# Altium PCB VX.PcbDoc
Units mm, origin at the board's own origin, x right, y up, seen from the top; angles counter-clockwise.
Board outline 65 x 35 mm, 2 copper layers (Top Layer, Bottom Layer); 22 components, 14 nets, 81 pads, 6 vias.
Unrouted connection lines stored in the file: 20.
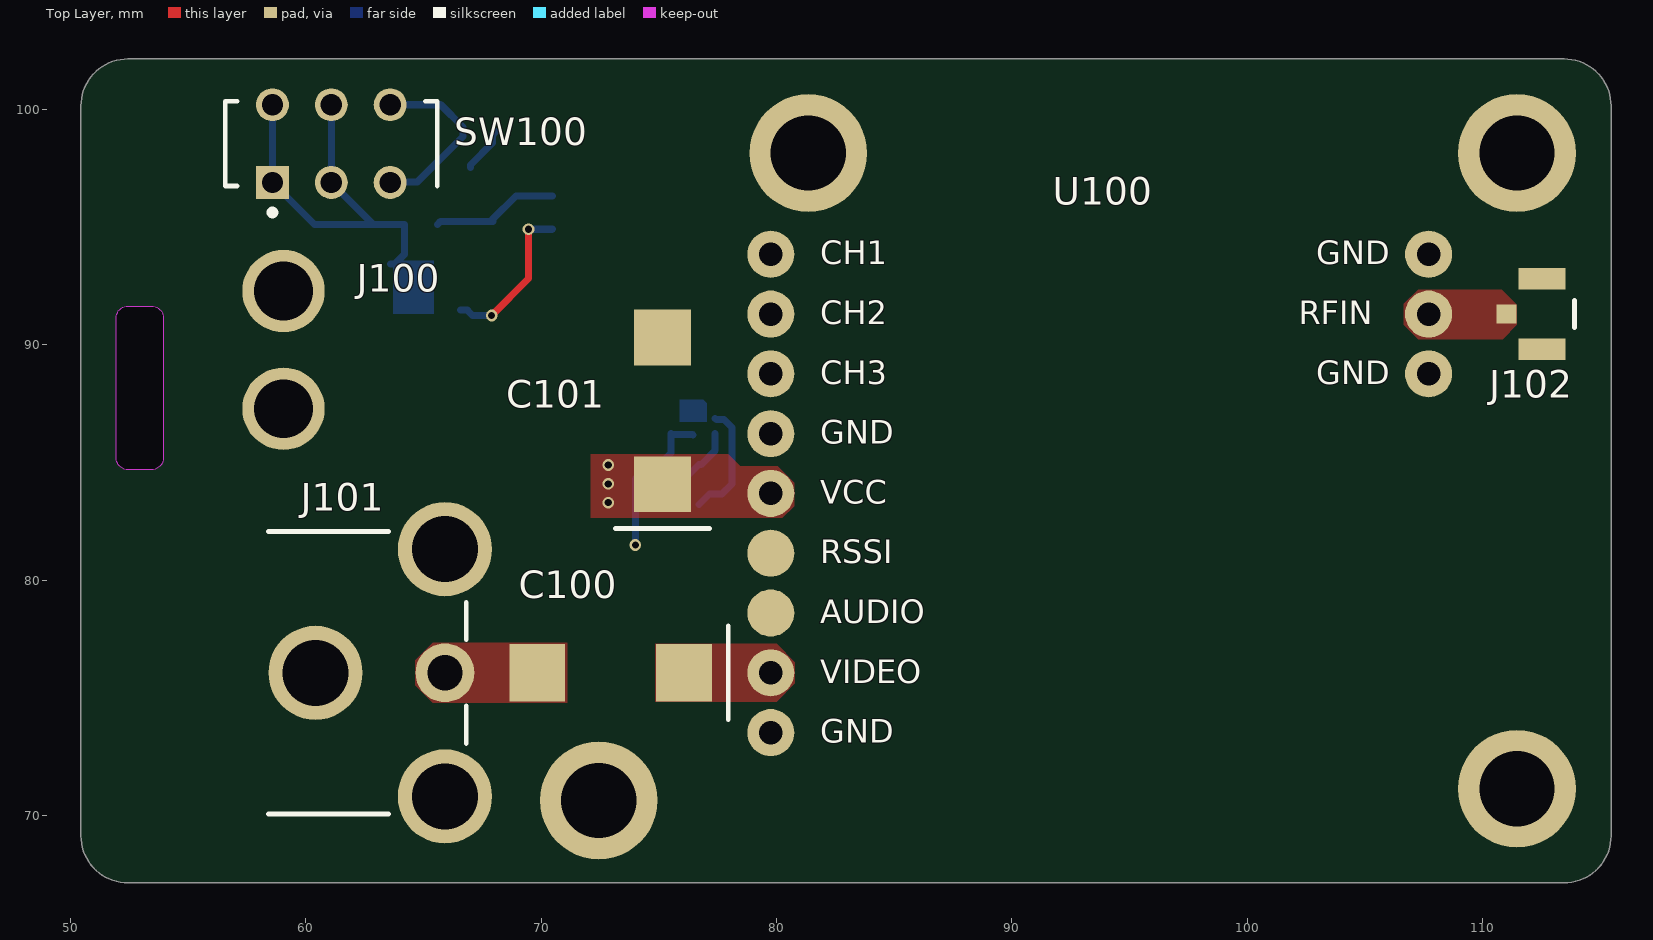
[diagram p0: Top Layer view]
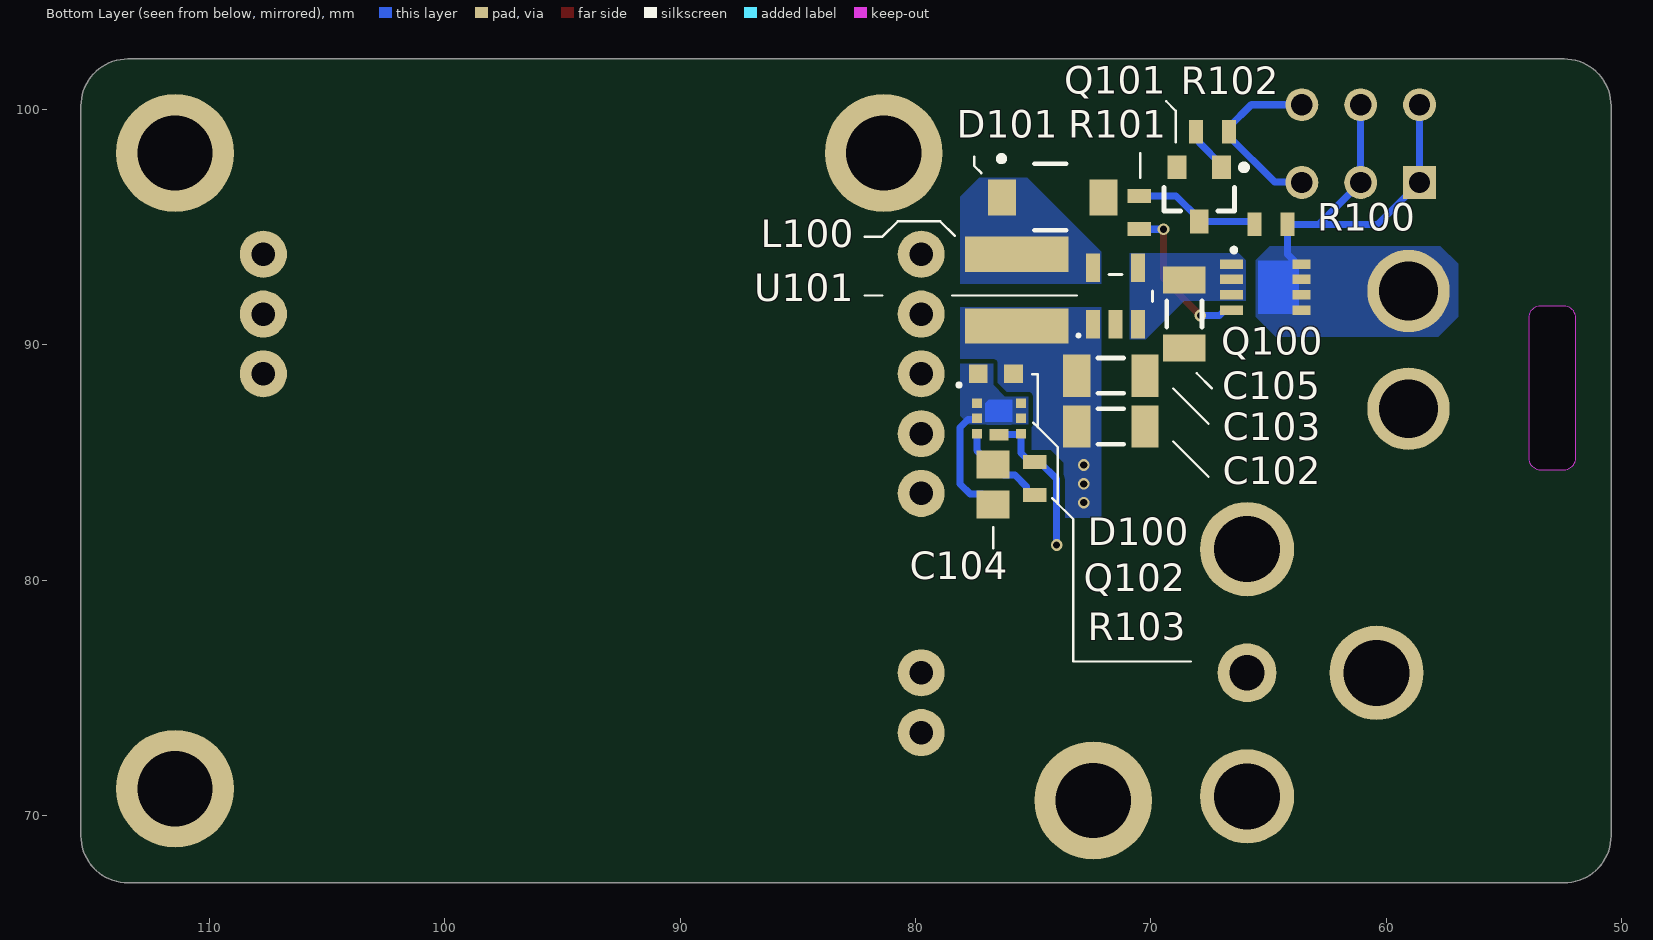
[diagram p1: Bottom Layer view, seen from below]
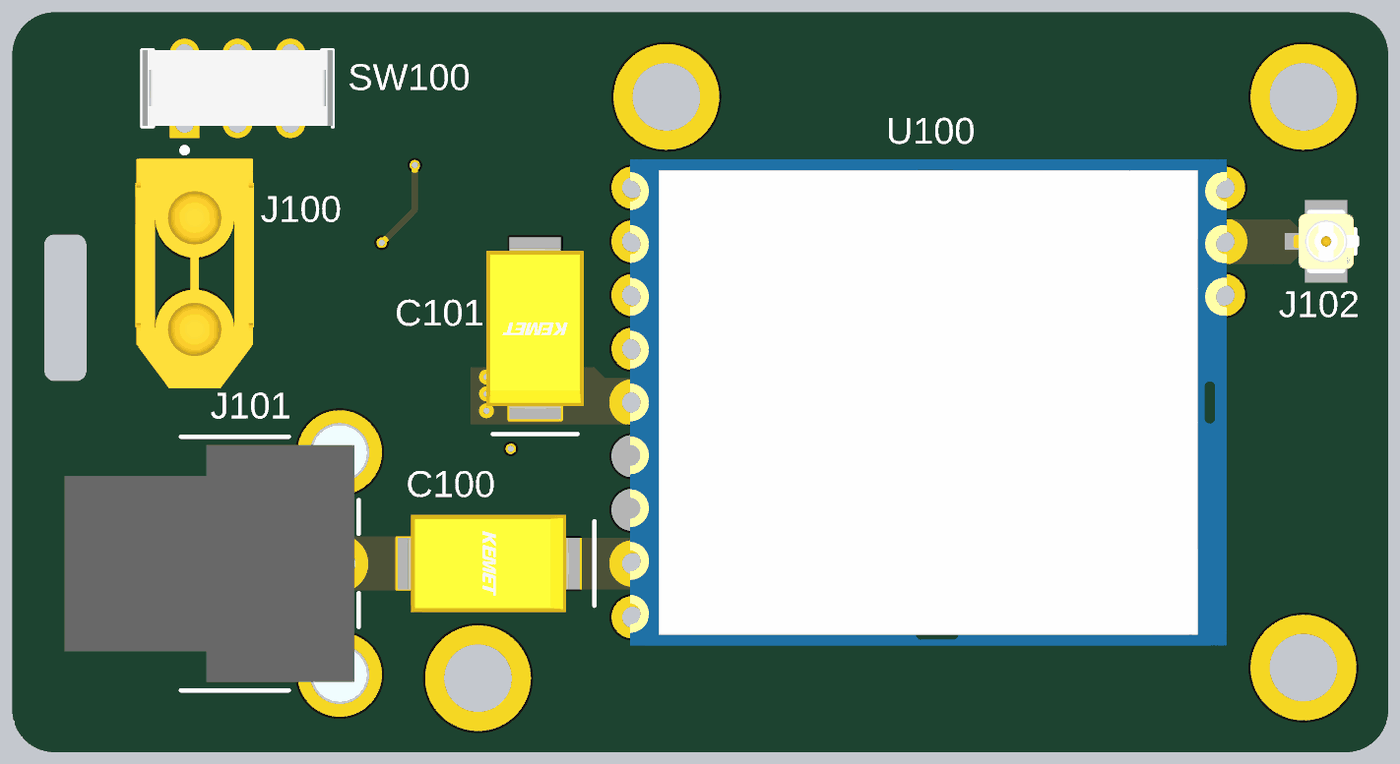
[diagram p2: 3D render of the assembled board from above, using the file's embedded part models]
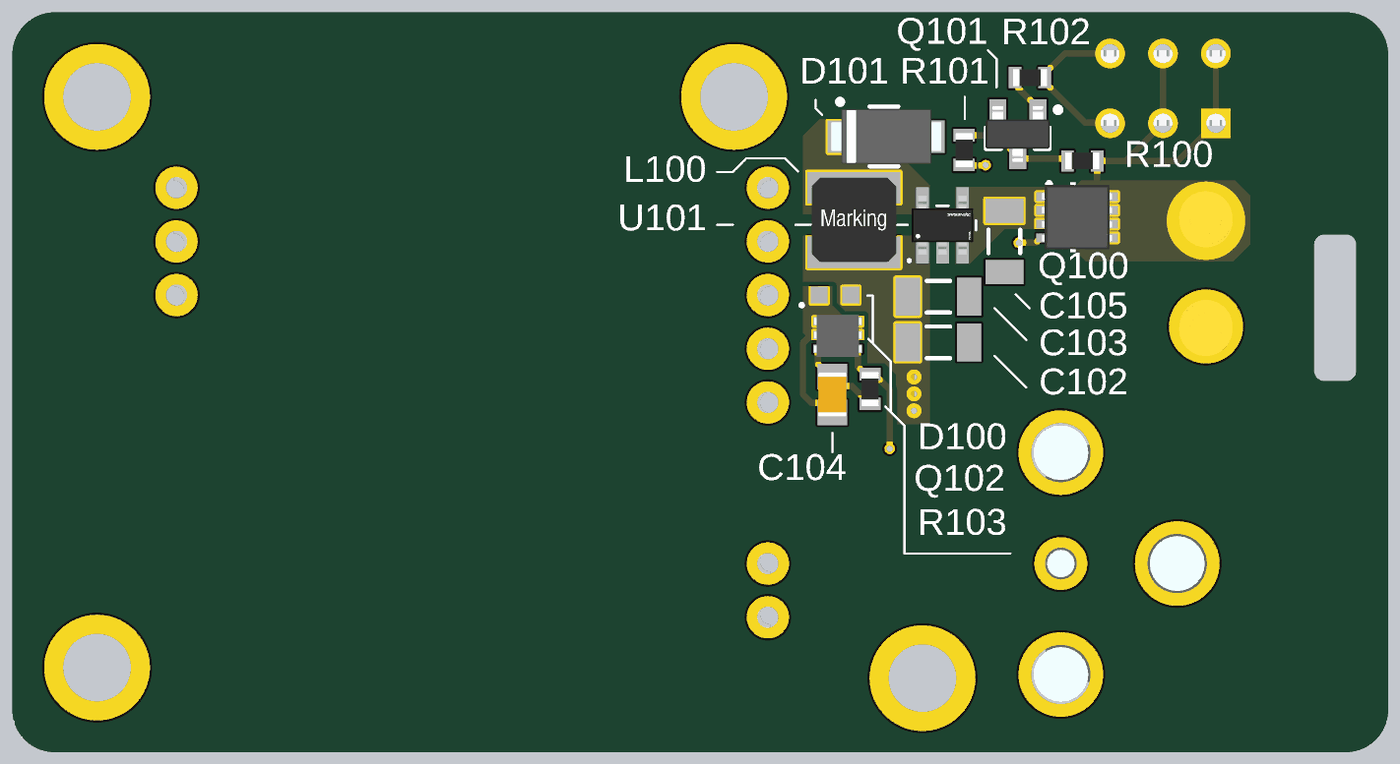
[diagram p3: 3D render of the assembled board from below, using the file's embedded part models]

## Layer stack, top to bottom
Top Solder: solder mask 0.0102, Solder Resist, Dk 3.5
Top Layer: signal copper 0.0356
Dielectric 1: dielectric 0.32, FR-4, Dk 4.8
Bottom Layer: signal copper 0.0356
Bottom Solder: solder mask 0.0102, Solder Resist, Dk 3.5

## Board outline
50.45,69.15 50.45,100.15 cw(c52.45,100.15) 52.45,102.15 113.45,102.15 cw(c113.45,100.15) 115.45,100.15 115.45,69.15 cw(c113.45,69.15) 113.45,67.15 52.45,67.15 cw(c52.45,69.15)
cut-out: 52.45,91.65 53.45,91.65 cw(c53.45,91.15) 53.95,91.15 53.95,85.2 cw(c53.45,85.2) 53.45,84.7 52.45,84.7 cw(c52.45,85.2) 51.95,85.2 51.95,91.15 cw(c52.45,91.15)

## Design rules (kind name [scope] priority, off if disabled: settings)
BoardOutlineClearance [All] p1: gap=0.254 ignorepadtopadclearanceinfootprint=FALSE except(0: Arc-SplitContinuation Track-SplitContinuation SMDPad-SplitContinuation THPad-SplitContinuation Via-SplitContinuation Fill-SplitContinuation Poly-SplitContinuation Region-SplitContinuation Text-SplitContinuation)
Clearance Clearance_1 [InNet('NetR101_1')] p1: gap=0.1 ignorepadtopadclearanceinfootprint=FALSE
Clearance [All] p2: gap=0.2 ignorepadtopadclearanceinfootprint=FALSE
ComponentClearance [All] p1: gap=0.254 collisioncheckmode=3 verticalgap=0.254 showdistances=FALSE donotcheckwithout3dbody=TRUE
DiffPairsRouting USB90 [All] p2: maxlimit=0.3 minlimit=0.127 mostfreqgap=0.127 toplayer_minwidth=0.12 toplayer_maxwidth=0.3 toplayer_prefwidth=0.157 bottomlayer_minwidth=0.12 bottomlayer_maxwidth=0.3 bottomlayer_prefwidth=0.157 impedanceprofiledriven=TRUE impedanceprofileid={D86571FE-92CB-432F-B134-A54A2EC93053} maxuncoupledlength=12.7
HoleSize [All] p1: absolutevalues=TRUE maxlimit=3 minlimit=0.025 maxpercent=80.000 minpercent=20.000
MinimumSolderMaskSliver [All] p1: minsoldermaskwidth=0
PlaneClearance [IsNamedPolygon('Main')] p1: clearance=1
PlaneClearance PlaneClearance_1 [All] p2: clearance=0.508
PolygonConnect PWRCon [IsPad And AsMM(HoleDiameter) > 1] p1: connectstyle=Direct reliefconductorwidth=0.254 reliefentries=4 polygonreliefangle="90 Angle" airgapwidth=0.254
PolygonConnect MainPWR [All vs IsNamedPolygon('Main') OR IsNamedPolygon('Main')] p2: connectstyle=Direct reliefconductorwidth=0.254 reliefentries=4 polygonreliefangle="90 Angle" airgapwidth=0.254
PolygonConnect [All] p3: thpad.connectstyle=Relief thpad.reliefconductorwidth=0.254 thpad.reliefentries=4 thpad.polygonreliefangle="90 Angle" thpad.airgapwidth=0.254 smdpad.connectstyle=Relief smdpad.reliefconductorwidth=0.254 smdpad.reliefentries=4 smdpad.polygonreliefangle="90 Angle" smdpad.airgapwidth=0.254 via.connectstyle=Direct via.reliefconductorwidth=0.254 via.reliefentries=4 via.polygonreliefangle="90 Angle" via.airgapwidth=0.254
RoutingVias [All] p1: holewidth=0.4 width=0.7 viastyle="Through Hole" minholewidth=0.3 minwidth=0.5 maxholewidth=0.7 maxwidth=1
SilkToSolderMaskClearance [IsPad] p1: minsilkscreentomaskgap=0.1 clearancetoexposedcopper=TRUE
SolderMaskExpansion IsVia [IsVia] p1: expansion=0 istentingtop=FALSE soldermaskfromhole=TRUE
SolderMaskExpansion SolderMaskExpansion_1 [All] p2: expansion=0.102 istentingtop=FALSE
SupplyNets "Schematic Supply Nets_8" [InNet('BAT_SW')] p1: voltage=0.000
SupplyNets "Schematic Supply Nets_7" [InNet('5V')] p2: voltage=0.000
SupplyNets "Schematic Supply Nets_4" [InNet('BAT+')] p3: voltage=0.000
SupplyNets "Schematic Supply Nets_1" [InNet('+12V')] p4: voltage=0.000
SupplyNets "Schematic Supply Nets" [InNet('GND')] p5: voltage=0.000
Width Antenna [InNetClass('RF_ANT')] p1: maxlimit=0.3 minlimit=0.2 preferedwidth=0.2 impedanceprofiledriven=TRUE impedanceprofileid={40622B75-4544-47BA-9745-DC227519050E} minimp=50.000000 maximp=50.000000 favimp=50.000000
Width Width_1 [All] p2: maxlimit=3 minlimit=0.2 preferedwidth=0.3 minimp=50.000000 maximp=50.000000 favimp=50.000000
25 further rules are at their usual default settings.

## Components (designator, comment, footprint, x,y, rotation, side; value= is the part's Value field where it differs from the comment)
C100 "T55D477M6R3C0015" T521X337M016ATE050-Footprint-1 72.953,76.073 r180 top value=470µF
C101 "T55D477M6R3C0015" T521X337M016ATE050-Footprint-1 75.15,87.2 r90 top value=470µF
C102 "22u" MLCC_1206_M 71.697,86.537 r0 bottom value=22µF
C103 "22u" MLCC_1206_M 71.697,88.696 r0 bottom value=22µF
C104 "10u" MLCC_0805_M 76.708,84.074 r270 bottom value=10µF
C105 "4.7u" MLCC_1206_M 68.58,91.313 r90 bottom value=4,7µF
D100 "Red" "0603 RED LED" 76.581,88.773 r0 bottom
D101 "VSSAF3M10HM3/H" VSSAF3M10HM3_H-Footprint-1 74.168,96.266 r180 bottom
J100 "XT30U-F" XT30U-F 59.055,89.789 r0 top
J101 "NYS354" NYS354 65.913,76.073 r90 top
J102 "U.FL-R-SMT-1(10)" FP-U_FL-R-SMT-1_10-MFG 112.523,91.313 r90 top
L100 "74404043220A" WE-LQS_4025 75.692,92.329 r270 bottom value=22µH
Q100 "SIS427EDN-T1-GE3" "Copy of TPN2R304PL,L1Q-Footprint-1" 65.146,92.456 r270 bottom
Q101 "BC848B,235" SOT-23-3 67.945,96.393 r270 bottom
Q102 "DMT3006LFDF-7" DMT3006LFDF-7 76.454,86.879 r270 bottom
R100 "100k" Resistor_0603_M 64.897,95.123 r180 bottom
R101 "100R" Resistor_0603_M 70.485,95.631 r270 bottom value=100
R102 "4.7k" Resistor_0603_M 67.375,99.06 r180 bottom value=4,7k
R103 "510k" Resistor_0603_M 74.93,84.328 r270 bottom
SW100 "JS202011CQN" FP-JS202011CQN-MFG 61.087,98.552 r0 top
U100 "RX5808" RX5808-Footprint-1 93.726,83.693 r0 top
U101 "RAA2118054GP3#JA0" P5_064B_MFG 71.501,92.075 r90 bottom

## Footprints (in the part's own frame and the unit in brackets; to place one, negate y for a bottom-side part, rotate by r counter-clockwise, add the part's x,y. Pads: shape width x height; smd on the part's side, far side on the other; paste and mask are expansions set on the pad)
"0603 RED LED" [mm] "Generic 0603 RED LED"
  rect 0.8x0.8 smd: 1(0.75,0) 2(-0.75,0)
  silkscreen extent 1.55,0.45 1.6,0.5, body extent -0.8,-0.4 0.8,0.4, height 0.4
"Copy of TPN2R304PL,L1Q-Footprint-1" [mm]
  rect 0.405x0.99 smd: 1(-0.975,-1.425) 2(-0.325,-1.425) 3(0.325,-1.425) 4(0.975,-1.425)
  rect 0.405x0.76 smd: 5(-0.975,1.545) 6(-0.325,1.545) 7(0.325,1.545) 8(0.975,1.545)
  Top Layer region: 1.125,-0.288 1.125,1.437 -1.125,1.437 -1.125,-0.288
  silkscreen extent -1.63,-1.38 -1.52,-1.27, body extent -1.65,-1.65 1.65,1.65, height 1.12
DMT3006LFDF-7 [mm] "DMT3006LFDF-7"
  rect 0.4x0.425 smd: 1(-0.65,-0.94) 2(0,-0.94) 3(0.65,-0.94) 4(0.65,0.94) 5(0,0.94) 6(-0.65,0.94)
  round 0.025 smd: 7(-0.325,0)
  rect 0.48x0.8 smd: 8(0.7,0)
  Top Layer region: -0.8,-0.425 -0.65,-0.575 0.15,-0.575 0.15,0.575 -0.8,0.575
  body extent -0.97,-1.11 1.02,1.11, height 0.73
FP-JS202011CQN-MFG [mm]
  rect 1.4x1.4 hole 0.9 paste-2539.97 mask+0: 1(-2.5,-1.65)
  round 1.4 hole 0.9 paste-2539.97 mask+0: 2(0,-1.65) 3(2.5,-1.65) 4(2.5,1.65) 5(0,1.65) 6(-2.5,1.65)
  silkscreen extent -4.5,-3.05 4.5,1.8, body extent -4.6,-2.45 4.6,2.45, height 0.25
FP-U_FL-R-SMT-1_10-MFG [mm]
  rect 0.9x2 smd mask+0: 0(-1.5,0) 0(1.5,0)
  rect 0.8x0.85 smd paste-1000 mask+0: 1(0,1.525)
  silkscreen extent -0.58,-1.38 0.58,-1.38, body extent -2.1,-1.48 2.1,2.15, height 0.25
MLCC_0805_M [mm] "Chip Capacitor, 2-Leads, Body 2,00x1,25mm, IPC Medium Density"
  rect 1.2x1.4 smd: 1(-0.85,0) 2(0.85,0)
  body extent -1.05,-0.67 1.05,0.67, height 1.35
MLCC_1206_M [mm]
  rect 1.15x1.8 smd: 1(-1.45,0) 2(1.45,0)
  silkscreen extent -0.55,-0.75 0.55,0.75, body extent -1.7,-0.9 1.7,0.9, height 0.75
NYS354 [mm] "NYS354 RCA connector solder pin mount"
  round 2.5 hole 1.5: 1(0,0)
  round 4 hole 2.8: 2(0,5.5) 3(-5.25,0) 4(5.25,0)
  silkscreen extent -6,-0.9 6,7.5, body extent -6.55,-1.29 6.55,13, height 12.1
P5_064B_MFG [mm] "Recommended Land Pattern"
  rect 1.2x0.6 smd paste+0 mask+0: 1(-1.2,0.95) 2(-1.2,0) 3(-1.2,-0.95) 4(1.2,-0.95) 5(1.2,0.95)
  silkscreen extent -1.74,-1.58 0.92,1.64, body extent -1.4,-1.45 1.4,1.45, height 1.1
Resistor_0603_M [mm]
  rect 0.6x1 smd: 1(-0.7,0) 2(0.7,0)
  body extent -0.8,-0.4 0.8,0.4, height 0.45
RX5808-Footprint-1 [mm]
  round 2 hole 1 unplated: 1(-13.97,-10.16) 2(-13.97,-7.62) 5(-13.97,0) 6(-13.97,2.54) 7(-13.97,5.08) 8(-13.97,7.62) 9(-13.97,10.16) 10(13.97,10.16) 11(13.97,7.62) 12(13.97,5.08)
  round 2 smd: 3(-13.97,-5.08) 4(-13.97,-2.54)
  body extent -14.1,-11.5 14.1,11.5, height 2.8
SOT-23-3 [mm] "SOT23, 3-Leads, Body 2,92x2,37mm, Pitch 0,95mm, IPC Medium Density"
  rect 1x0.8 smd: 1(-1.15,0.95) 2(-1.15,-0.95) 3(1.15,0)
  silkscreen extent -1.27,-1.5 0.7,2.02, body extent -1.32,-1.52 1.32,1.52, height 1.11
T521X337M016ATE050-Footprint-1 [mm]
  rect 2.37x2.43 smd: 1(-3.12,0) 2(3.12,0)
  silkscreen extent -5,-2 -5,2, body extent -3.8,-2.3 3.8,2.3, height 4.26
VSSAF3M10HM3_H-Footprint-1 [mm]
  rect 1.2x1.52 smd: 1(-2.16,0) 2(2.16,0)
  silkscreen extent -2.29,-1.4 0.58,1.76, body extent -2.59,-1.29 2.61,1.31, height 1
WE-LQS_4025 [mm] "SMD Power Inductor, 2-Leads, body 4x4mm"
  rect 1.5x4.4 smd: 1(-1.525,0) 2(1.525,0)
  body extent -2,-2 2,2, height 2.15
XT30U-F [mm]
  round 3.5 hole 2.5: 1(0,2.5) 2(0,-2.5)
  body extent -2.8,-5.44 2.82,5.43, height 9.67

## Part data
C100 C101: library part CMP-001-1777-1, "Cap Tant Polymer 470uF 6.3VDC D CASE 20% (7.3 X 4.3 X 2.8mm) SMD 7343-31 0.015 Ohm 105C T/R", Capacitance=470uF, Capacitor Type=Tantalum, Case/Package=2917, ESR (Equivalent Series Resistance)=15mR, Leakage Current=296uA, Manufacturer=Vishay, Max Operating Temperature=105°C, Min Operating Temperature=-55°C, Tolerance=20%, Voltage=6.3V, Depth=4.3mm, Dielectric=Tantalum, Dissipation Factor=10%, Height=2.8mm, Lead Pitch=3.8mm, Length=7.3mm, Mount=SMD, Part number=T55D477M6R3C0015, Pins=2, REACH SVHC="No SVHC", RoHS=Yes
C102 C103: library part CMP-001-1113-2, "MLCC, 1206, 22u, 10%, 16V, X5R", Capacitor Type=Ceramic, Case/Package=1206, Dielectric=X5R, Manufacturer=Any, Tolerance=10%, Voltage=16V, Mount=SMD, Part number="MLCC, 1206, 22u, 10%, 16V, X5R", RoHS=Yes
C104: library part CMP-001-0829-2, "MLCC, 0805, 10u, 10%, 50V, X5R", Capacitor Type=Ceramic, Case/Package=0805, Dielectric=X5R, Manufacturer=Any, Tolerance=10%, Voltage=50V, Mount=SMD, Part number="MLCC, 0805, 10u, 10%, 50V, X5R", RoHS=Yes
C105: library part CMP-001-1124-2, "MLCC, 1206, 4.7u, 10%, 35V, X5R", Capacitor Type=Ceramic, Case/Package=1206, Dielectric=X5R, Manufacturer=Any, Tolerance=10%, Voltage=35V, Mount=SMD, Part number="MLCC, 1206, 4.7u, 10%, 35V, X5R", RoHS=Yes
D100: library part CMP-ROOT-00025-2, "Generic red 0603 LED", Case/Package=0603, Manufacturer=Any, Part number="Any Red 0603 LED", Color=Red, Mount=SMD, RoHS=Yes
D101: library part CMP-ROOT-01308-2, "Rectifier Diode, Schottky, 1 Phase, 1 Element, 2.3A, 100V V(RRM), Silicon, DO-221AC", Case/Package=DO-221AC-2, Forward Voltage=720mV, Max Forward Surge Current (Ifsm)=80A, Max Operating Temperature=175°C, Max Output Current=2.3A, Min Operating Temperature=-40°C, Peak Reverse Current=200µA, Reverse Standoff Voltage=100V, Lifecycle Status=Production, Manufacturer=VSSAF3M10HM3/H, Mount=SMD, Number of Elements=1, Number of Terminals=2, Part number=VSSAF3M10HM3/H, Pins=2, REACH SVHC=No, RoHS=Compliant
J100: library part CMP-ROOT-01262-6, "Power Connector", Case/Package=Non-standard, Color=Yellow, Manufacturer=AMASS, Contact Material=Brass, Mount=SMD, Orientation=Straight, Part number=XT30U-F, Pins=2, RoHS=Yes
J101: library part CMP-ROOT-01344-2, "RCA Phono Connector Shielded Right Angle Solder Pin", Manufacturer=REAN, Contact Material=Brass, Contact Plating=Nickel, Mount=TH, Part number=NYS354, Pins=4, Ports=1, RoHS=Yes
J102: library part CMP-ROOT-01143-2, "RF CONNECTOR RF Connector, 1 Contact(s), Male, Board Mount, Surface Mount Terminal, Receptacle", Clock Frequency=6GHz, Dielectric Material=Polymer, Housing Color=Beige, Insulation Resistance=500MR, Manufacturer="Hirose Electric Co Ltd", Max Operating Temperature=90°C, Min Operating Temperature=-40°C, Package Quantity=2500, Voltage Rating=60V, Body Material=Bronze, Body Plating=Silver, Center Contact Plating=Gold, Connector Type="Receptacle,Male Pin", Contact Material=Brass, Fastening Type=SNAP-ON, Impedance=50R, Lead Free="Lead Free", Mating Cycles=30, Mount=TH, Mounting Technology="Surface Mount", Number of Contacts=1, Number of Ports=1, Orientation=Straight, Packaging="Tape and Reel", Part number=U.FL-R-SMT-1(10), Pins=2, RoHS=Yes, Series=U.FL, Termination=Solder, Weight=0.001764oz
L100: library part CMP-ROOT-01309-1, "General Purpose Inductor, 22uH, 20%, 1 Element, Nickel-zinc Ferrite-Core, SMD, 1616", Ambient Temperature Range High=85°C, Ambient Temperature Range Low=-40°C, Case/Package="4mm x 4mm", Current Rating=1.11A, DC Resistance (DCR)=200mΩ, Inductance Tolerance=20%, Manufacturer="Wurth Elektronik", Max Operating Temperature=125°C, Height=2.5mm, Length=4mm, Min Operating Temperature=-40°C, Mount=SMD, Part number=74404043220A, Pins=2, RoHS=Compliant, Width=4mm
Q100: library part CMP-ROOT-01317-2, "Trans MOSFET P-CH 30V 15A 8-Pin PowerPAK EP T/R", Case/Package="PowerPAK® 1212-8", Continuous Drain Current (ID)=50A, Drain to Source Breakdown Voltage=-30V, Drain to Source Resistance=10.6mΩ, Drain to Source Voltage (Vdss)=30V, Gate to Source Voltage (Vgs)=25V, Input Capacitance=1.93nF, Manufacturer="Vishay Siliconix", Max Operating Temperature=150°C, Max Power Dissipation=52W, Min Operating Temperature=-55°C, Element Configuration=Single, Export Control Classification Number (ECCN) Code=EAR99, Fall Time=12ns, Introduction Date=2013-06-25, Lifecycle Status=Production, Min Breakdown Voltage=30V, Mount=SMD, Mounting Technology="Surface Mount", Number of Channels=1, Number of Elements=1, Number of Terminals=5, Part number=SIS427EDN-T1-GE3, Pins=8, Radiation Hardening=No, Rds On Max=10.6mΩ, REACH SVHC=Unknown, Rise Time=40ns, RoHS=Compliant, Schedule B=8541290080, Turn-Off Delay Time=28ns, Turn-On Delay Time=45ns
Q101: library part CMP-ROOT-01328-1, "Small Signal Bipolar Transistor, 0.1A I(C), 30V V(BR)CEO, 1-Element, NPN, Silicon, TO-236AB", Case/Package=SOT-23, Collector Base Voltage (VCBO)=30V, Collector Emitter Saturation Voltage=600mV, Emitter Base Voltage (VEBO)=5V, Frequency=100MHz, Manufacturer=Nexperia, Manufacturer Lifecycle Status="RELEASED FOR SUPPLY", Max Collector Current=100mA, Max Operating Temperature=150°C, Max Power Dissipation=250mW, Min Operating Temperature=-65°C, China RoHS=Compliant, Collector Emitter Breakdown Voltage=30V, Collector Emitter Voltage (VCEO)=30V, Contact Plating=Tin, Element Configuration=Single, Gain Bandwidth Product=100MHz, hFE Min=200, Lifecycle Status=Production, Mount=SMD, Mounting Technology="Surface Mount", Number of Elements=1, Number of Terminals=3, Part number=BC848B,235, Pins=3, Polarity=NPN, Power Dissipation=250mW, Radiation Hardening=No, REACH SVHC=Yes, RoHS=Compliant, Transition Frequency=100MHz
Q102: library part CMP-ROOT-01331-1, "Mosfet, N-Ch, 30V, 14.1A, Udfn2020 Rohs Compliant: Yes", Case/Package=DFN-2020-6, Continuous Drain Current (ID)=14.1A, Drain to Source Resistance=7mΩ, Drain to Source Voltage (Vdss)=30V, Input Capacitance=1.32nF, Manufacturer="Diodes Incorporated", Max Operating Temperature=150°C, Max Power Dissipation=2.1W, Min Operating Temperature=-55°C, China RoHS=Compliant, Lifecycle Status=Production, Min Breakdown Voltage=30V, Mount=SMD, Mounting Technology="Surface Mount", Number of Elements=1, Number of Terminals=6, Part number=DMT3006LFDF-7, Pins=8, Rds On Max=7mΩ, REACH SVHC=Yes, RoHS=Compliant
R100: library part CMP-001-0125-2, "Resistor, 0603, 100k, 1%, 1/10W", Case/Package=0603, Manufacturer=Any, Power=100mW, Tolerance=1%, Mount=SMD, Part number="Resistor, 0603, 100k, 1%, 1/10W", RoHS=Yes
R101: library part CMP-001-0054-5, "Resistor, 0603, 100R, 1%, 1/10W", Case/Package=0603, Manufacturer=Any, Power=100mW, Tolerance=1%, Mount=SMD, Part number="Resistor, 0603, 100R, 1%, 1/10W", RoHS=Yes
R102: library part CMP-001-0093-2, "Resistor, 0603, 4.7k, 1%, 1/10W", Case/Package=0603, Manufacturer=Any, Power=100mW, Tolerance=1%, Mount=SMD, Part number="Resistor, 0603, 4.7k, 1%, 1/10W", RoHS=Yes
R103: library part CMP-001-0142-2, "Resistor, 0603, 510k, 1%, 1/10W", Case/Package=0603, Manufacturer=Any, Power=100mW, Tolerance=1%, Mount=SMD, Part number="Resistor, 0603, 510k, 1%, 1/10W", RoHS=Yes
SW100: library part CMP-ROOT-01260-4, "Slide Switch, 1 Positions, Dpdt, Latched, 0.3A, 6Vdc, 6 Pcb Hole Cnt, Solder Terminal, Through", Case/Package=Non-standard, Color=Black, Contact Current Rating=300mA, Contact Resistance=70mΩ, Flammability Rating="UL94 V-0", Insulation Resistance=100MΩ, Manufacturer=C&K, Max Operating Temperature=85°C, Max Voltage Rating (DC)=6V, Min Operating Temperature=-40°C, Actuator Length=2.0066mm, Actuator Material=Nylon, Contact Plating=Silver, Current Rating=300mA, Depth=3.6mm, Electrical Life=5kcycles, Height=3.5mm, Housing Material=Nylon, Illumination Type=Non-Illuminated, Lead Free="Lead Free", Length=9mm, Life (Cycles)=5kcycles, Lifecycle Status=Production, Max Current Rating=300mA, Mount=SMD, Mounting Technology="Through Hole", Number of Positions=1, Orientation=Vertical, Packaging=Bulk, Part number=JS202011CQN, Pins=6, Radiation Hardening=No, REACH SVHC=Yes, RoHS=Compliant, Switch Function=On-On, Switch Travel=2mm, Terminal Material=Brass, Termination="PC Pins", Throw Configuration=DPDT, Voltage Rating (DC)=6V
U100: library part CMP-ROOT-01340-1, "RX5808 Video Module", Case/Package=Module, Manufacturer=Unknown, Mount=SMD, Part number=RX5808, Pins=12, RoHS=Yes
U101: library part CMP-00019-3, "Switching Regulator, Current-mode, 0.3A, 230kHz Switching Freq-Max, PDSO5", Case/Package=TSOT, Manufacturer="Renesas / Intersil", Manufacturer Lifecycle Status=ACTIVE, Max Junction Temperature (Tj)=125°C, Max Output Current=300mA, Max Output Voltage=5.15V, Max Supply Voltage=80V, Max Switching Frequency=230kHz, Min Input Voltage=7V, Min Operating Temperature=-40°C, Min Output Voltage=3.18V, Nominal Output Voltage=5V, Nominal Supply Voltage=18V, Package Quantity=3000, Export Control Classification Number (ECCN) Code=EAR99, Harmonized Tariff Schedule (HTS) Code=8540000000, Height=850µm, Height - Seated (Max)=1.1mm, Length=2.9mm, Lifecycle Status=Production, Max Operating Temperature=125°C, Mount=SMD, Mounting Technology="Surface Mount", MSL=3, Number of Circuits=1, Number of Terminals=5, Part Family=RAA211805, Part number=RAA2118054GP3#JA0, Pins=5, Pitch=1mm, REACH SVHC=Yes, RoHS=Compliant, Terminal Pitch=950µm, Topology=Buck, Width=1.6mm

## Free pads (board coordinates)
  round 5 hole 3.2: 0(72.45,70.65) 0(81.35,98.15) 0(111.45,71.15) 0(111.45,98.15)

## Via types
v1: diameter 0.5, hole 0.3, Top Layer to Bottom Layer, 6 vias

## Nets (pads, with @x,y where several pads share a name; then routed paths per layer and width w, separated by ;. In a path a pad name is that pad's centre, name@x,y a point inside that pad or via, vN(x,y) a via of type N, cw(c..) or ccw(c..) an arc to the next point about the centre after c; other vN are vias at no path point)
5V: C101.1 C102.2 C103.2 D100.2 L100.2 U100.5 U101.1
  other v1: 72.85,83.3 72.85,84.1 72.85,84.9
+12V: C105.2 Q100.1 Q100.2 Q100.3 U101.3 U101.4
BAT+: J100.1 Q100.5 Q100.6 Q100.7 Q100.8 R100.2 SW100.1 SW100.2 SW100.5 SW100.6 | length 17.5
  Bottom Layer w0.3: SW100.6 SW100.1 60.366,95.123 62.866,95.123 ; SW100.5 SW100.2 62.866,95.123 ; Q100.5 63.779,93.431 64.197,93.849 R100.2 62.866,95.123
BAT_SW: R102.2 SW100.3 SW100.4 | length 7.8
  Bottom Layer w0.3: SW100.3 63.607,96.922 64.737,96.922 66.675,98.86 R102.2 66.675,99.26 65.733,100.202 SW100.4
GND: C101.2 C102.1 C103.1 C105.1 D101.2 J100.2 J101.2 J101.3 J101.4 J102.0 Q101.2 Q102.4 Q102.8 R103.1 U100.1 U100.6 U100.7 U100.8 U100.9 U100.10 U100.12 U101.2 | length 6.6
  Bottom Layer w0.3: v1(74,81.5) 74,84.298 74.73,85.028 75.13,85.028 75.514,85.412 Q102.4 75.539,86.204 76.429,86.204 Q102.8
NetC100_1: C100.1 U100.2
NetC100_2: C100.2 J101.1
NetC104_1: C104.1 Q102.3 R103.2 | length 4.1
  Bottom Layer w0.3: R103.2 75.13,83.628 75.28,83.778 75.28,83.978 75.776,84.474 76.258,84.474 C104.1 76.808,84.924 77.394,85.51 Q102.3
NetC104_2: C104.2 D100.1 Q102.1 Q102.2 Q102.5 Q102.6 Q102.7 | length 5
  Bottom Layer w0.3: C104.2 77.158,83.674 77.674,83.674 78.1,84.1 78.1,86.5 77.771,86.829 77.444,86.829 Q102.2
NetD101_1: D101.1 L100.1 U101.5
NetJ102_1: J102.1 U100.11
NetQ100_4: Q100.4 R101.2 | length 6.8
  Top Layer w0.3: v1(67.9,91.25) 69.465,92.816 v1(69.465,94.915)
  Bottom Layer w0.3: Q100.4 66.864,91.481 66.916,91.428 66.916,91.426 67.092,91.25 v1(67.9,91.25) ; v1(69.465,94.915) 70.47,94.915 R101.2
NetQ101_1: Q101.1 R102.1 | length 2
  Bottom Layer w0.3: Q101.1 66.995,97.643 67.925,98.573 67.925,98.91 R102.1
NetQ101_3: Q101.3 R100.1 R101.1 | length 5.4
  Bottom Layer w0.3: R100.1 65.717,95.243 Q101.3 67.945,95.343 68.933,96.331 R101.1
pads on no net: U100.3 U100.4

## Polygon pours and split planes (outlines as drawn)
5V on Bottom Layer "Main" (solid, remove dead copper, pour order 1): 73.7,82.65 73.7,85 74.25,85.55 75.05,85.55 75.05,87.907 76.203,87.907 76.625,88.329 76.625,89.284 78.1,89.284 78.1,91.6 72.1,91.6 72.1,82.65
BAT+ on Bottom Layer "Main" (solid, remove dead copper, pour order 4): 64.7,90.35 65.55,91.2 65.55,93.6 64.95,94.2 57.7,94.2 56.95,93.45 56.95,91.2 57.8,90.35
+12V on Bottom Layer "Main" (solid, remove dead copper, pour order 3): 65.975,91.884 68.591,91.884 70.225,90.25 70.9,90.25 70.9,93.9 66.275,93.9 65.975,93.6
NetD101_1 on Bottom Layer "Main" (solid, remove dead copper, pour order 2): 72.1,92.6 78.1,92.6 78.1,96.3 77.3,97.1 75.25,97.1 72.1,93.95
NetC104_2 on Bottom Layer "Main" (solid, remove dead copper, pour order 0): 75.2,87.8 75.2,86.6 77.7,86.6 78.1,87 78.1,89.2 76.7,89.2 76.7,88.3 76.2,87.8
5V on Top Layer "Main" (solid, remove dead copper, pour order 8): 72.1,82.65 80.25,82.65 80.75,83.15 80.75,84.15 80.05,84.85 78.45,84.85 77.95,85.35 72.1,85.35
NetJ102_1 on Top Layer "Main" (solid, remove dead copper, pour order 7): 110.85,90.25 111.45,90.85 111.45,91.7 110.8,92.35 107.25,92.35 106.65,91.75 106.65,90.85 107.25,90.25
NetC100_1 on Top Layer "Main" (solid, remove dead copper, pour order 6): 74.85,74.85 80,74.85 80.769,75.619 80.769,76.531 80,77.3 74.85,77.3
NetC100_2 on Top Layer "Main" (solid, remove dead copper, pour order 5): 64.65,75.55 64.65,76.6 65.4,77.35 71.1,77.35 71.1,74.8 65.4,74.8

## Silkscreen, mask and mechanical layers (free items; w line width, h text height)
Bottom Overlay:
  lines w0.1: 67.4,88.15 68.05,88.8 ; 67.55,84.4 69.05,85.9 ; 67.55,86.65 69.05,88.15 ; 68.3,76.55 68.8,76.55 73.3,76.55 73.3,82.6 74.1,83.4 ; 68.95,98.6 68.95,99.95 69.35,100.35 ; 70.45,97.1 70.45,98.15 ; 73.15,92.1 78.45,92.1 ; 74.196,83.496 73.95,83.25 73.95,85.65 74.8,86.5 ; 75,86.7 74.8,86.5 ; 75.05,88.75 74.8,88.75 74.8,86.5 ; 76.7,81.35 76.7,82.25 ; 77.2,97.3 77.5,97.6 77.5,98 ; 78.325,94.625 78.95,95.25 80.75,95.25 81.4,94.6 82.15,94.6 ; 81.4,92.1 82.15,92.1
Mechanical 1:
  lines w0.1: 50.45,69.15 ccw(c52.45,69.15) 52.45,67.15 113.45,67.15 ccw(c113.45,69.15) 115.45,69.15 115.45,100.15 ccw(c113.45,100.15) 113.45,102.15 52.45,102.15 ccw(c52.45,100.15) 50.45,100.15 50.45,87.15 50.45,69.15

## Text inside footprints (layer, text, board x,y; h text height)
U100: Top Overlay "GND" at 102.925,88.338 h1; Top Overlay "RFIN" at 102.181,90.878 h1; Top Overlay "GND" at 102.925,93.418 h1; Top Overlay "GND" at 81.861,73.098 h1; Top Overlay "VIDEO" at 81.861,75.638 h1; Top Overlay "AUDIO" at 81.861,78.178 h1; Top Overlay "RSSI" at 81.861,80.718 h1; Top Overlay "VCC" at 81.861,83.258 h1; Top Overlay "GND" at 81.861,85.798 h1; Top Overlay "CH3" at 81.861,88.338 h1; Top Overlay "CH2" at 81.861,90.878 h1; Top Overlay "CH1" at 81.861,93.418 h1